# EAGLE board MM-Qwiic-Snap-1x1-Panel (EAGLE 9.6.2), part 1 of 2
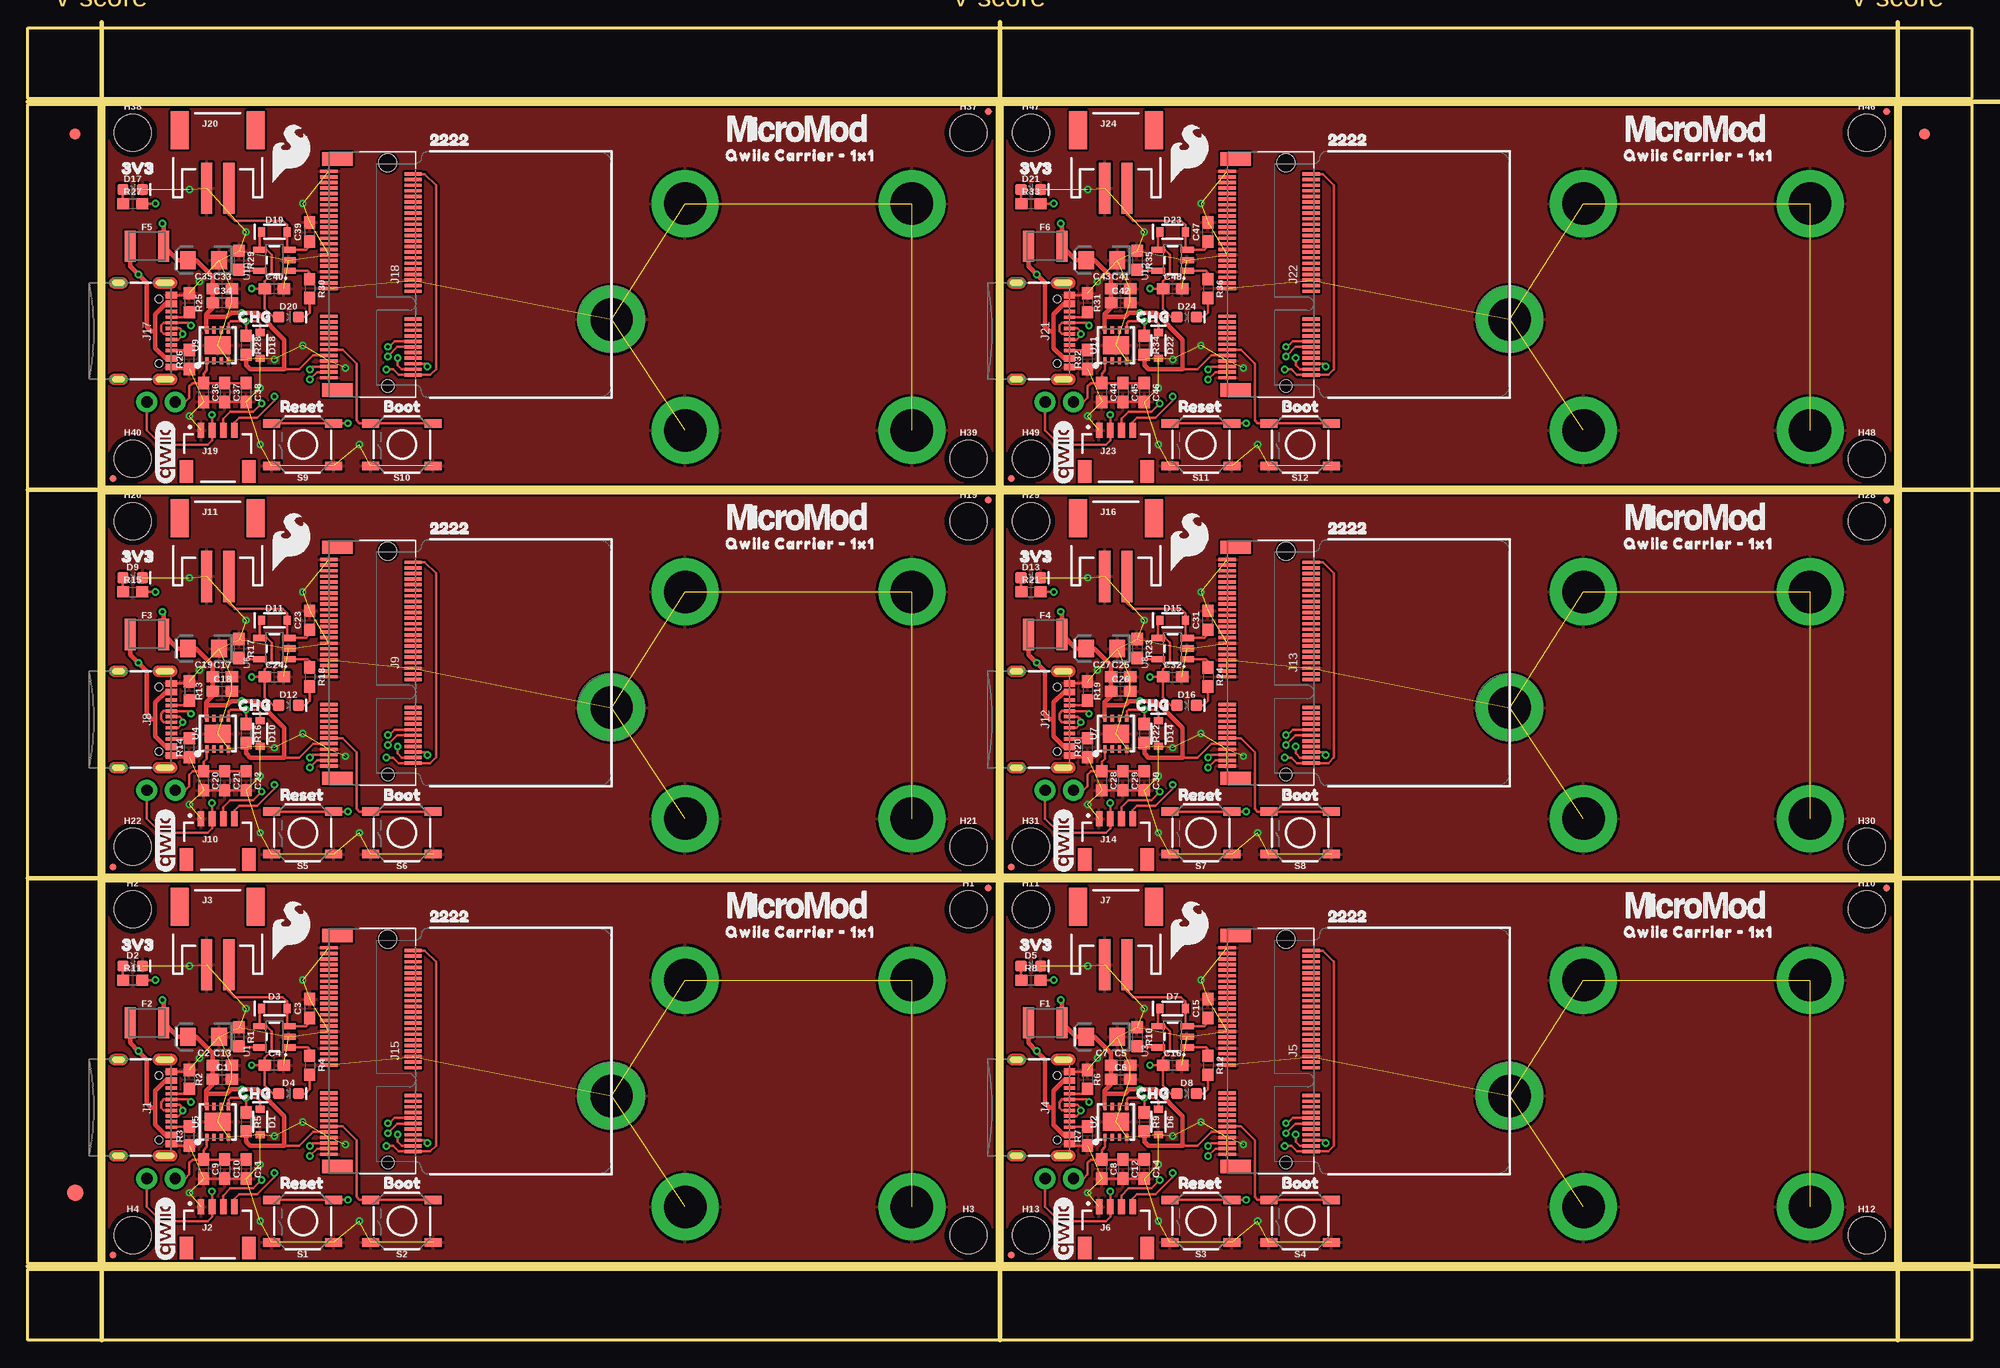
[diagram p0: board, top side]
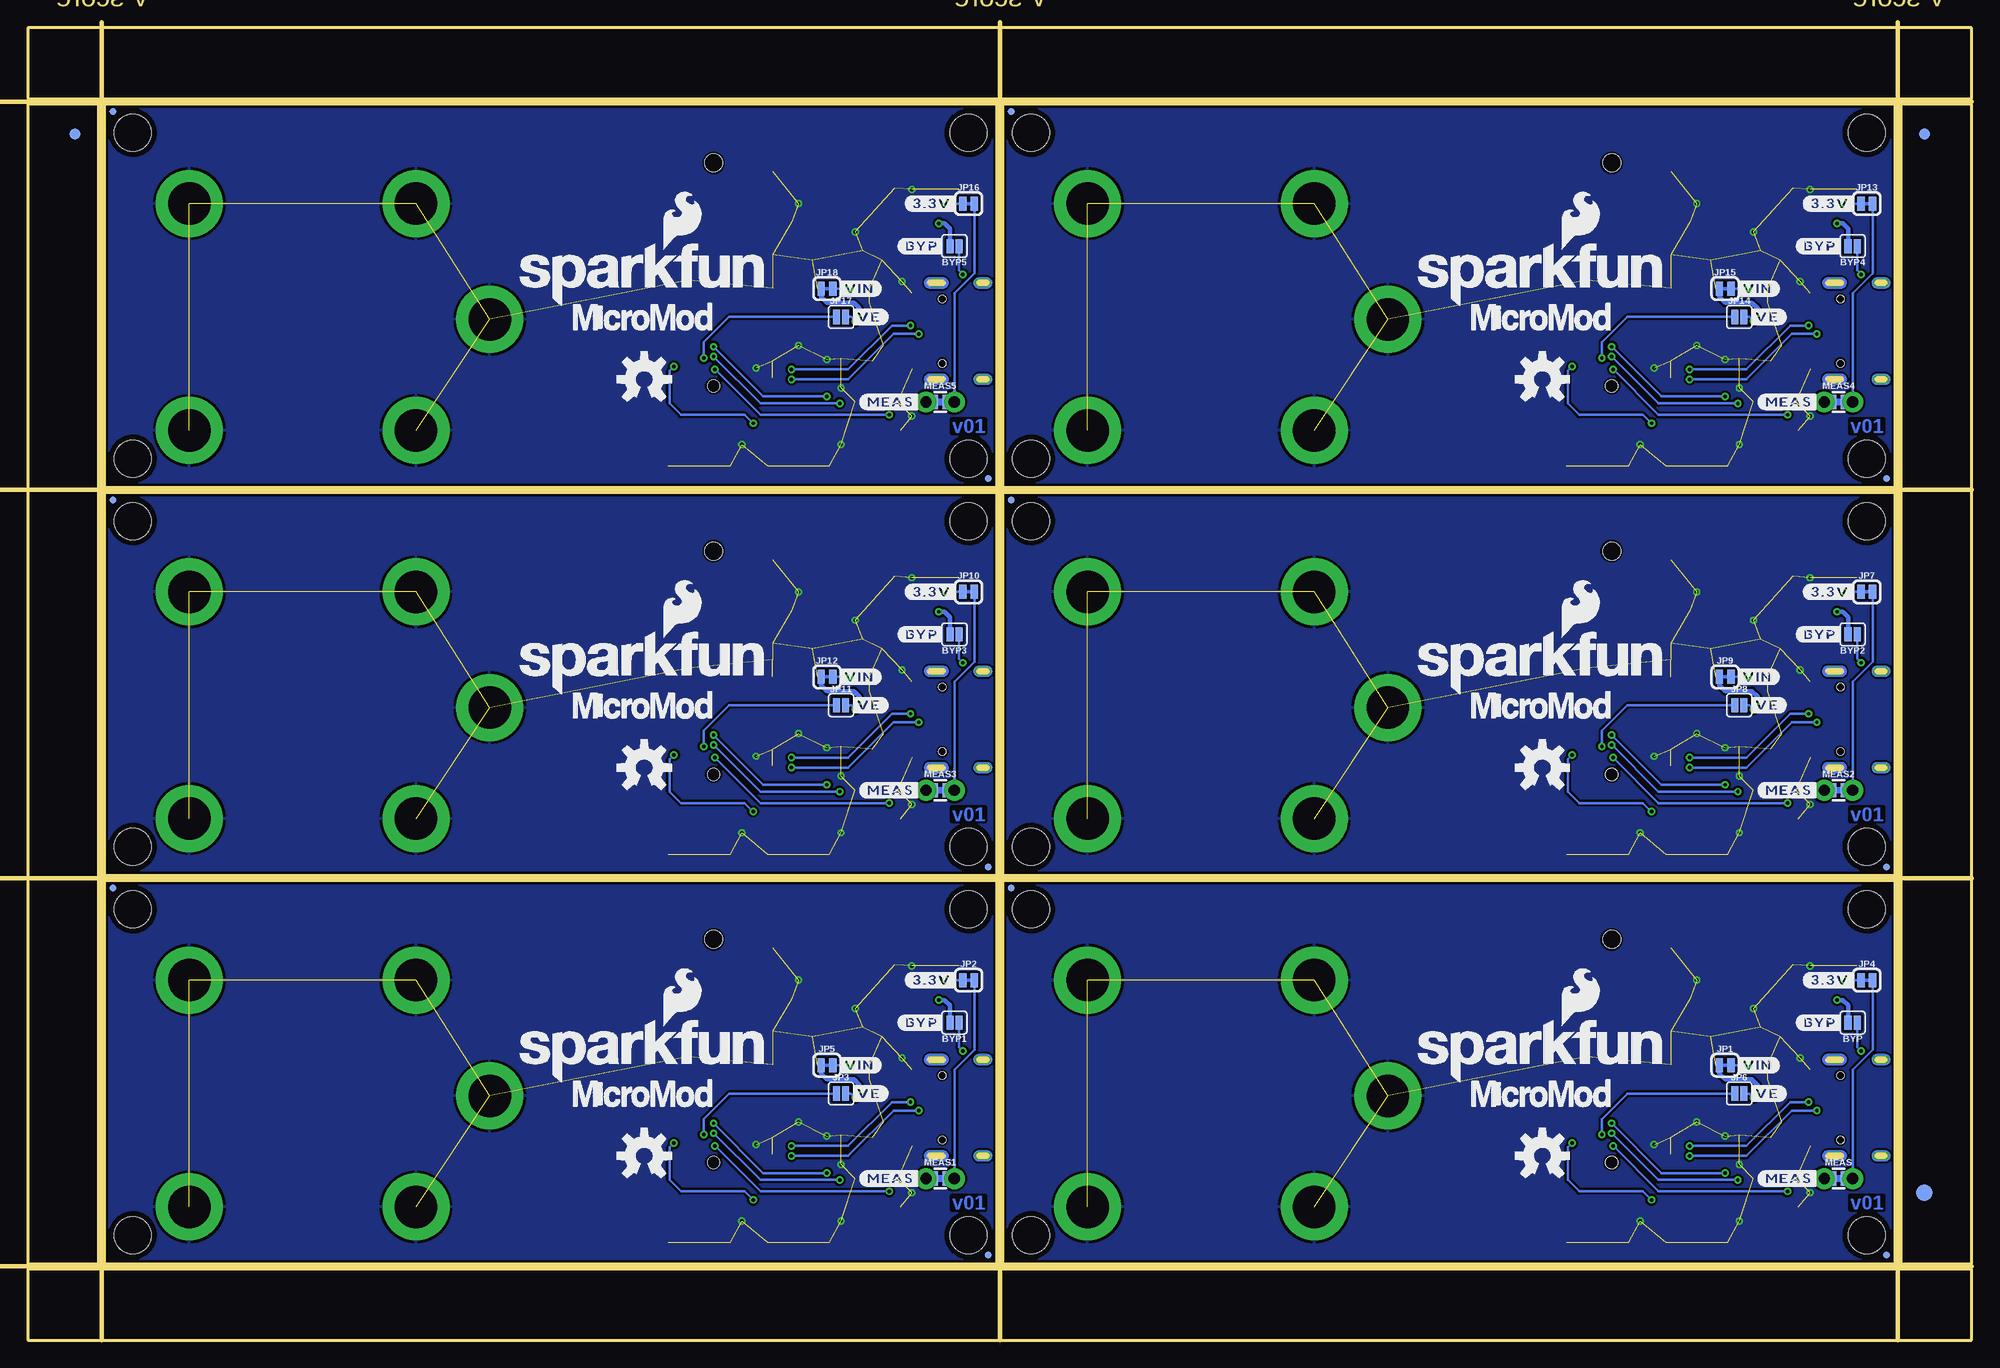
[diagram p1: board, bottom side, seen from below]

Size 174.24 x 117.6 mm. Coordinates in mm from the lower left corner, seen from the top.
Outline: 6.86,6.86 6.86,41.15 86.87,41.15 86.87,6.86 6.86,6.86
Outline: 87.38,6.86 87.38,41.15 167.39,41.15 167.39,6.86 87.38,6.86
Outline: 6.86,41.66 6.86,75.95 86.87,75.95 86.87,41.66 6.86,41.66
Outline: 87.38,41.66 87.38,75.95 167.39,75.95 167.39,41.66 87.38,41.66
Outline: 6.86,76.45 6.86,110.74 86.87,110.74 86.87,76.45 6.86,76.45
Outline: 87.38,76.45 87.38,110.74 167.39,110.74 167.39,76.45 87.38,76.45
Outline: 0,6.35 174.24,6.35 174.24,0 0,0 0,6.35
Outline: 167.89,110.74 174.24,110.74 174.24,6.86 167.89,6.86 167.89,110.74
Outline: 0,117.6 174.24,117.6 174.24,111.25 0,111.25 0,117.6
Outline: 0,110.74 6.35,110.74 6.35,6.86 0,6.86 0,110.74
Copper layers (1*16): Top 0.035mm / dielectric 1.5mm / Bottom 0.035mm
Design rules "MM-Qwiic-Snap-1x1": minimum track width 7mil, minimum drill 12mil, track to track 7mil, track to pad 7mil, pad to pad 7mil, via to via 7mil, smd to smd 7mil, copper to edge 7mil, drill to drill 7mil, minimum pad ring 7mil, minimum via ring 7mil, stop-mask expansion 4mil, vias tented up to drill 25mil, thermal gap 10mil
Net classes: 0 default: width 0 mm, drill 0 mm
Milling: 7 lines

## Footprints (pad centres in the part's own frame; a part is rotated, then mirrored left to right if it is on the bottom)
SMT-JUMPER_2_NO_SILK = smd 0.635 x 1.27: 1 -0.406,0; 2 0.406,0
0603 = smd 1.1 x 1: 1 -0.85,0; 2 0.85,0
EIA3216 = smd 1.4 x 1.6: + 1.4,0; - -1.4,0
SOD-323 = smd 0.63 x 0.83: A 1.15,0; C -1.15,0
LED-0603 = smd 1 x 1: A -0.877,0; C 0.877,0
FIDUCIAL-1X2 = smd 1 x 1: 1 0,0
FIDUCIAL-1.5X3 = smd 1.5 x 1.5: 1 0,0
1210 = smd 1 x 2.8: 1 -1.5,0; 2 1.5,0
FIDUCIAL-MICRO = smd 0.635 x 0.635: 1 0,0
STAND-OFF = hole 3.302: 0,0
STAND-OFF-REFLOW-M2.5 = drill 3.8 pad 6: 1 0,0
USB-C-16P-2LAYER-PADS = smd 0.3 x 1: A5 -1.25,-0.34; A6 -0.25,-0.34; A7 0.25,-0.34; A8 1.25,-0.34; B5 1.75,-0.34; B6 0.75,-0.34; B7 -0.75,-0.34; B8 -1.75,-0.34 | smd 0.6 x 1: GND -3.225,-0.34; GND2 3.225,-0.34; VBUS1 -2.45,-0.34; VBUS2 2.45,-0.34 | drill 0.4 pad 0.6 long: SHLD1 -4.318,-0.915; SHLD2 4.318,-0.915; SHLD3 -4.318,-5.095; SHLD4 4.318,-5.095 | hole 0.65: -2.89,-1.445; 2.89,-1.445
JST04_1MM_RA = smd 0.6 x 1.35: 1 -1.5,0; 2 -0.5,0; 3 0.5,0; 4 1.5,0 | smd 1.2 x 2: NC1 2.8,-3.675; NC2 -2.8,-3.675
JST-2-SMD = smd 1 x 4.6: 1 -1,-3.7; 2 1,-3.7 | smd 1.6 x 3.4: NC1 -3.4,1.5; NC2 3.4,1.5
M.2-CONNECTOR-E = smd 0.3 x 1.55: 1 9.25,-5.275; 2 9,2.275; 3 8.75,-5.275; 4 8.5,2.275; 5 8.25,-5.275; 6 8,2.275; 7 7.75,-5.275; 8 7.5,2.275; 9 7.25,-5.275; 10 7,2.275; 11 6.75,-5.275; 12 6.5,2.275; 13 6.25,-5.275; 14 6,2.275; 15 5.75,-5.275; 16 5.5,2.275; 17 5.25,-5.275; 18 5,2.275; 19 4.75,-5.275; 20 4.5,2.275; 21 4.25,-5.275; 22 4,2.275; 23 3.75,-5.275; 32 1.5,2.275; 33 1.25,-5.275; 34 1,2.275; 35 0.75,-5.275; 36 0.5,2.275; 37 0.25,-5.275; 38 0,2.275; 39 -0.25,-5.275; 40 -0.5,2.275; 41 -0.75,-5.275; 42 -1,2.275; 43 -1.25,-5.275; 44 -1.5,2.275; 45 -1.75,-5.275; 46 -2,2.275; 47 -2.25,-5.275; 48 -2.5,2.275; 49 -2.75,-5.275; 50 -3,2.275; 51 -3.25,-5.275; 52 -3.5,2.275; 53 -3.75,-5.275; 54 -4,2.275; 55 -4.25,-5.275; 56 -4.5,2.275; 57 -4.75,-5.275; 58 -5,2.275; 59 -5.25,-5.275; 60 -5.5,2.275; 61 -5.75,-5.275; 62 -6,2.275; 63 -6.25,-5.275; 64 -6.5,2.275; 65 -6.75,-5.275; 66 -7,2.275; 67 -7.25,-5.275; 68 -7.5,2.275; 69 -7.75,-5.275; 70 -8,2.275; 71 -8.25,-5.275; 72 -8.5,2.275; 73 -8.75,-5.275; 74 -9,2.275; 75 -9.25,-5.275 | smd 1.2 x 2.75: A1 10.35,-4.5; A2 -10.35,-4.5 | hole 1.1: 10,0 | hole 1.6: -10,0
SMT-JUMPER_2_NC_TRACE_SILK = smd 0.66 x 1.27: 1 -0.521,0; 2 0.521,0
COMBO-JUMPER_2_NC_TRACE = smd 0.635 x 1.27: 1 -0.508,0; 2 0.508,0 | drill 1.016 pad 1.88: 3 -1.27,0; 4 1.27,0
TACTILE_SWITCH_SMD_5.2MM = smd 1.524 x 0.762: 1 -2.794,1.905; 2 2.794,1.905; 3 -2.794,-1.905; 4 2.794,-1.905
SOT23-5 = smd 0.55 x 1.2: 1 -0.95,-1.3; 2 0,-1.3; 3 0.95,-1.3; 4 0.95,1.3; 5 -0.95,1.3
UDFN-8 = smd 0.3 x 0.65: 1 -0.975,-1.375; 2 -0.325,-1.375; 3 0.325,-1.375; 4 0.975,-1.375; 5 0.975,1.375; 6 0.325,1.375; 7 -0.325,1.375; 8 -0.975,1.375 | smd 2.35 x 1.6: EP 0,0

## Placement (x,y rotation side)
BYP  JUMPER-SMT_2_NO_SILK  [SMT-JUMPER_2_NO_SILK]  10.67,28.45 180 bottom
BYP1  JUMPER-SMT_2_NO_SILK  [SMT-JUMPER_2_NO_SILK]  91.19,28.45 180 bottom
BYP2  JUMPER-SMT_2_NO_SILK  [SMT-JUMPER_2_NO_SILK]  10.67,63.25 180 bottom
BYP3  JUMPER-SMT_2_NO_SILK  [SMT-JUMPER_2_NO_SILK]  91.19,63.25 180 bottom
BYP4  JUMPER-SMT_2_NO_SILK  [SMT-JUMPER_2_NO_SILK]  10.67,98.04 180 bottom
BYP5  JUMPER-SMT_2_NO_SILK  [SMT-JUMPER_2_NO_SILK]  91.19,98.04 180 bottom
C1  0.1uF  [0603]  17.44,23.37 0 top
C2  10uF  [EIA3216]  15.75,27.18 180 top
C3  4.7uF  [0603]  25.27,29.72 90 top
C4  4.7uF  [0603]  22.1,24.64 0 top
C5  0.22uF  [0603]  97.96,24.64 0 top
C6  0.1uF  [0603]  97.96,23.37 0 top
C7  10uF  [EIA3216]  96.27,27.18 180 top
C8  10uF  [0603]  96.27,15.33 270 top
C9  10uF  [0603]  15.75,15.33 270 top
C10  1.0uF  [0603]  17.65,15.33 270 top
C11  0.22uF  [0603]  19.56,15.33 270 top
C12  1.0uF  [0603]  98.17,15.33 270 top
C13  0.22uF  [0603]  17.44,24.64 0 top
C14  0.22uF  [0603]  100.08,15.33 270 top
C15  4.7uF  [0603]  105.79,29.72 90 top
C16  4.7uF  [0603]  102.62,24.64 0 top
C17  0.22uF  [0603]  17.44,59.44 0 top
C18  0.1uF  [0603]  17.44,58.17 0 top
C19  10uF  [EIA3216]  15.75,61.98 180 top
C20  10uF  [0603]  15.75,50.13 270 top
C21  1.0uF  [0603]  17.65,50.13 270 top
C22  0.22uF  [0603]  19.56,50.13 270 top
C23  4.7uF  [0603]  25.27,64.52 90 top
C24  4.7uF  [0603]  22.1,59.44 0 top
C25  0.22uF  [0603]  97.96,59.44 0 top
C26  0.1uF  [0603]  97.96,58.17 0 top
C27  10uF  [EIA3216]  96.27,61.98 180 top
C28  10uF  [0603]  96.27,50.13 270 top
C29  1.0uF  [0603]  98.17,50.13 270 top
C30  0.22uF  [0603]  100.08,50.13 270 top
C31  4.7uF  [0603]  105.79,64.52 90 top
C32  4.7uF  [0603]  102.62,59.44 0 top
C33  0.22uF  [0603]  17.44,94.23 0 top
C34  0.1uF  [0603]  17.44,92.96 0 top
C35  10uF  [EIA3216]  15.75,96.77 180 top
C36  10uF  [0603]  15.75,84.92 270 top
C37  1.0uF  [0603]  17.65,84.92 270 top
C38  0.22uF  [0603]  19.56,84.92 270 top
C39  4.7uF  [0603]  25.27,99.31 90 top
C40  4.7uF  [0603]  22.1,94.23 0 top
C41  0.22uF  [0603]  97.96,94.23 0 top
C42  0.1uF  [0603]  97.96,92.96 0 top
C43  10uF  [EIA3216]  96.27,96.77 180 top
C44  10uF  [0603]  96.27,84.92 270 top
C45  1.0uF  [0603]  98.17,84.92 270 top
C46  0.22uF  [0603]  100.08,84.92 270 top
C47  4.7uF  [0603]  105.79,99.31 90 top
C48  4.7uF  [0603]  102.62,94.23 0 top
D1  3.3V  [SOD-323]  20.83,19.56 270 top
D2  RED  [LED-0603]  9.4,33.53 0 top
D3  3A/10V/280mV  [SOD-323]  22.1,29.72 0 top
D4  Yellow  [LED-0603]  23.37,22.1 0 top
D5  RED  [LED-0603]  89.92,33.53 0 top
D6  3.3V  [SOD-323]  101.35,19.56 270 top
D7  3A/10V/280mV  [SOD-323]  102.62,29.72 0 top
D8  Yellow  [LED-0603]  103.89,22.1 0 top
D9  RED  [LED-0603]  9.4,68.33 0 top
D10  3.3V  [SOD-323]  20.83,54.36 270 top
D11  3A/10V/280mV  [SOD-323]  22.1,64.52 0 top
D12  Yellow  [LED-0603]  23.37,56.9 0 top
D13  RED  [LED-0603]  89.92,68.33 0 top
D14  3.3V  [SOD-323]  101.35,54.36 270 top
D15  3A/10V/280mV  [SOD-323]  102.62,64.52 0 top
D16  Yellow  [LED-0603]  103.89,56.9 0 top
D17  RED  [LED-0603]  9.4,103.12 0 top
D18  3.3V  [SOD-323]  20.83,89.15 270 top
D19  3A/10V/280mV  [SOD-323]  22.1,99.31 0 top
D20  Yellow  [LED-0603]  23.37,91.69 0 top
D21  RED  [LED-0603]  89.92,103.12 0 top
D22  3.3V  [SOD-323]  101.35,89.15 270 top
D23  3A/10V/280mV  [SOD-323]  102.62,99.31 0 top
D24  Yellow  [LED-0603]  103.89,91.69 0 top
E$1  [FIDUCIAL-1X2]  4.23,108.08 0 top
E$2  [FIDUCIAL-1X2]  4.23,108.08 0 bottom
E$3  [FIDUCIAL-1X2]  170.01,108.08 0 top
E$4  [FIDUCIAL-1X2]  170.01,108.08 0 bottom
E$5  [FIDUCIAL-1.5X3]  4.23,13.21 0 top
E$6  [FIDUCIAL-1.5X3]  4.23,13.21 0 bottom
F1  6V/2A  [1210]  91.19,28.45 0 top
F2  6V/2A  [1210]  10.67,28.45 0 top
F3  6V/2A  [1210]  10.67,63.25 0 top
F4  6V/2A  [1210]  91.19,63.25 0 top
F5  6V/2A  [1210]  10.67,98.04 0 top
F6  6V/2A  [1210]  91.19,98.04 0 top
FD1  FIDUCIALUFIDUCIAL  [FIDUCIAL-MICRO]  7.62,7.62 0 top
FD2  FIDUCIALUFIDUCIAL  [FIDUCIAL-MICRO]  86.11,40.51 0 top
FD3  FIDUCIALUFIDUCIAL  [FIDUCIAL-MICRO]  7.62,7.62 0 bottom
FD4  FIDUCIALUFIDUCIAL  [FIDUCIAL-MICRO]  86.11,40.51 0 bottom
FD5  FIDUCIALUFIDUCIAL  [FIDUCIAL-MICRO]  88.14,7.62 0 top
FD6  FIDUCIALUFIDUCIAL  [FIDUCIAL-MICRO]  166.62,40.51 0 top
FD7  FIDUCIALUFIDUCIAL  [FIDUCIAL-MICRO]  88.14,7.62 0 bottom
FD8  FIDUCIALUFIDUCIAL  [FIDUCIAL-MICRO]  166.62,40.51 0 bottom
FD9  FIDUCIALUFIDUCIAL  [FIDUCIAL-MICRO]  7.62,42.42 0 top
FD10  FIDUCIALUFIDUCIAL  [FIDUCIAL-MICRO]  86.11,75.31 0 top
FD11  FIDUCIALUFIDUCIAL  [FIDUCIAL-MICRO]  7.62,42.42 0 bottom
FD12  FIDUCIALUFIDUCIAL  [FIDUCIAL-MICRO]  86.11,75.31 0 bottom
FD13  FIDUCIALUFIDUCIAL  [FIDUCIAL-MICRO]  88.14,42.42 0 top
FD14  FIDUCIALUFIDUCIAL  [FIDUCIAL-MICRO]  166.62,75.31 0 top
FD15  FIDUCIALUFIDUCIAL  [FIDUCIAL-MICRO]  88.14,42.42 0 bottom
FD16  FIDUCIALUFIDUCIAL  [FIDUCIAL-MICRO]  166.62,75.31 0 bottom
FD17  FIDUCIALUFIDUCIAL  [FIDUCIAL-MICRO]  7.62,77.22 0 top
FD18  FIDUCIALUFIDUCIAL  [FIDUCIAL-MICRO]  86.11,110.11 0 top
FD19  FIDUCIALUFIDUCIAL  [FIDUCIAL-MICRO]  7.62,77.22 0 bottom
FD20  FIDUCIALUFIDUCIAL  [FIDUCIAL-MICRO]  86.11,110.11 0 bottom
FD21  FIDUCIALUFIDUCIAL  [FIDUCIAL-MICRO]  88.14,77.22 0 top
FD22  FIDUCIALUFIDUCIAL  [FIDUCIAL-MICRO]  166.62,110.11 0 top
FD23  FIDUCIALUFIDUCIAL  [FIDUCIAL-MICRO]  88.14,77.22 0 bottom
FD24  FIDUCIALUFIDUCIAL  [FIDUCIAL-MICRO]  166.62,110.11 0 bottom
H1  STAND-OFF  [STAND-OFF]  84.33,38.61 0 top
H2  STAND-OFF  [STAND-OFF]  9.4,38.61 0 top
H3  STAND-OFF  [STAND-OFF]  84.33,9.4 0 top
H4  STAND-OFF  [STAND-OFF]  9.4,9.4 0 top
H5  STAND-OFF-REFLOW2.5MM_TALL  [STAND-OFF-REFLOW-M2.5]  52.33,21.89 0 top
H6  STAND-OFF-REFLOW2.5MM_TALL  [STAND-OFF-REFLOW-M2.5]  58.93,32.26 0 top
H7  STAND-OFF-REFLOW2.5MM_TALL  [STAND-OFF-REFLOW-M2.5]  58.93,11.94 0 top
H8  STAND-OFF-REFLOW2.5MM_TALL  [STAND-OFF-REFLOW-M2.5]  79.25,11.94 0 top
H9  STAND-OFF-REFLOW2.5MM_TALL  [STAND-OFF-REFLOW-M2.5]  79.25,32.26 0 top
H10  STAND-OFF  [STAND-OFF]  164.85,38.61 0 top
H11  STAND-OFF  [STAND-OFF]  89.92,38.61 0 top
H12  STAND-OFF  [STAND-OFF]  164.85,9.4 0 top
H13  STAND-OFF  [STAND-OFF]  89.92,9.4 0 top
H14  STAND-OFF-REFLOW2.5MM_TALL  [STAND-OFF-REFLOW-M2.5]  132.85,21.89 0 top
H15  STAND-OFF-REFLOW2.5MM_TALL  [STAND-OFF-REFLOW-M2.5]  139.45,32.26 0 top
H16  STAND-OFF-REFLOW2.5MM_TALL  [STAND-OFF-REFLOW-M2.5]  139.45,11.94 0 top
H17  STAND-OFF-REFLOW2.5MM_TALL  [STAND-OFF-REFLOW-M2.5]  159.77,11.94 0 top
H18  STAND-OFF-REFLOW2.5MM_TALL  [STAND-OFF-REFLOW-M2.5]  159.77,32.26 0 top
H19  STAND-OFF  [STAND-OFF]  84.33,73.41 0 top
H20  STAND-OFF  [STAND-OFF]  9.4,73.41 0 top
H21  STAND-OFF  [STAND-OFF]  84.33,44.2 0 top
H22  STAND-OFF  [STAND-OFF]  9.4,44.2 0 top
H23  STAND-OFF-REFLOW2.5MM_TALL  [STAND-OFF-REFLOW-M2.5]  52.33,56.69 0 top
H24  STAND-OFF-REFLOW2.5MM_TALL  [STAND-OFF-REFLOW-M2.5]  58.93,67.06 0 top
H25  STAND-OFF-REFLOW2.5MM_TALL  [STAND-OFF-REFLOW-M2.5]  58.93,46.74 0 top
H26  STAND-OFF-REFLOW2.5MM_TALL  [STAND-OFF-REFLOW-M2.5]  79.25,46.74 0 top
H27  STAND-OFF-REFLOW2.5MM_TALL  [STAND-OFF-REFLOW-M2.5]  79.25,67.06 0 top
H28  STAND-OFF  [STAND-OFF]  164.85,73.41 0 top
H29  STAND-OFF  [STAND-OFF]  89.92,73.41 0 top
H30  STAND-OFF  [STAND-OFF]  164.85,44.2 0 top
H31  STAND-OFF  [STAND-OFF]  89.92,44.2 0 top
H32  STAND-OFF-REFLOW2.5MM_TALL  [STAND-OFF-REFLOW-M2.5]  132.85,56.69 0 top
H33  STAND-OFF-REFLOW2.5MM_TALL  [STAND-OFF-REFLOW-M2.5]  139.45,67.06 0 top
H34  STAND-OFF-REFLOW2.5MM_TALL  [STAND-OFF-REFLOW-M2.5]  139.45,46.74 0 top
H35  STAND-OFF-REFLOW2.5MM_TALL  [STAND-OFF-REFLOW-M2.5]  159.77,46.74 0 top
H36  STAND-OFF-REFLOW2.5MM_TALL  [STAND-OFF-REFLOW-M2.5]  159.77,67.06 0 top
H37  STAND-OFF  [STAND-OFF]  84.33,108.2 0 top
H38  STAND-OFF  [STAND-OFF]  9.4,108.2 0 top
H39  STAND-OFF  [STAND-OFF]  84.33,78.99 0 top
H40  STAND-OFF  [STAND-OFF]  9.4,78.99 0 top
H41  STAND-OFF-REFLOW2.5MM_TALL  [STAND-OFF-REFLOW-M2.5]  52.33,91.48 0 top
H42  STAND-OFF-REFLOW2.5MM_TALL  [STAND-OFF-REFLOW-M2.5]  58.93,101.85 0 top
H43  STAND-OFF-REFLOW2.5MM_TALL  [STAND-OFF-REFLOW-M2.5]  58.93,81.53 0 top
H44  STAND-OFF-REFLOW2.5MM_TALL  [STAND-OFF-REFLOW-M2.5]  79.25,81.53 0 top
H45  STAND-OFF-REFLOW2.5MM_TALL  [STAND-OFF-REFLOW-M2.5]  79.25,101.85 0 top
H46  STAND-OFF  [STAND-OFF]  164.85,108.2 0 top
H47  STAND-OFF  [STAND-OFF]  89.92,108.2 0 top
H48  STAND-OFF  [STAND-OFF]  164.85,78.99 0 top
H49  STAND-OFF  [STAND-OFF]  89.92,78.99 0 top
H50  STAND-OFF-REFLOW2.5MM_TALL  [STAND-OFF-REFLOW-M2.5]  132.85,91.48 0 top
H51  STAND-OFF-REFLOW2.5MM_TALL  [STAND-OFF-REFLOW-M2.5]  139.45,101.85 0 top
H52  STAND-OFF-REFLOW2.5MM_TALL  [STAND-OFF-REFLOW-M2.5]  139.45,81.53 0 top
H53  STAND-OFF-REFLOW2.5MM_TALL  [STAND-OFF-REFLOW-M2.5]  159.77,81.53 0 top
H54  STAND-OFF-REFLOW2.5MM_TALL  [STAND-OFF-REFLOW-M2.5]  159.77,101.85 0 top
J1  [USB-C-16P-2LAYER-PADS]  13.21,20.83 270 top
J2  QWIIC_RIGHT_ANGLE  [JST04_1MM_RA]  17.02,11.94 0 top
J3  [JST-2-SMD]  17.02,37.34 0 top
J4  [USB-C-16P-2LAYER-PADS]  93.73,20.83 270 top
J5  MICROMOD-2222-C  [M.2-CONNECTOR-E]  112.78,25.91 270 top
J6  QWIIC_RIGHT_ANGLE  [JST04_1MM_RA]  97.54,11.94 0 top
J7  [JST-2-SMD]  97.54,37.34 0 top
J8  [USB-C-16P-2LAYER-PADS]  13.21,55.63 270 top
J9  MICROMOD-2222-C  [M.2-CONNECTOR-E]  32.26,60.71 270 top
J10  QWIIC_RIGHT_ANGLE  [JST04_1MM_RA]  17.02,46.74 0 top
J11  [JST-2-SMD]  17.02,72.14 0 top
J12  [USB-C-16P-2LAYER-PADS]  93.73,55.63 270 top
J13  MICROMOD-2222-C  [M.2-CONNECTOR-E]  112.78,60.71 270 top
J14  QWIIC_RIGHT_ANGLE  [JST04_1MM_RA]  97.54,46.74 0 top
J15  MICROMOD-2222-C  [M.2-CONNECTOR-E]  32.26,25.91 270 top
J16  [JST-2-SMD]  97.54,72.14 0 top
J17  [USB-C-16P-2LAYER-PADS]  13.21,90.42 270 top
J18  MICROMOD-2222-C  [M.2-CONNECTOR-E]  32.26,95.5 270 top
J19  QWIIC_RIGHT_ANGLE  [JST04_1MM_RA]  17.02,81.53 0 top
J20  [JST-2-SMD]  17.02,106.93 0 top
J21  [USB-C-16P-2LAYER-PADS]  93.73,90.42 270 top
J22  MICROMOD-2222-C  [M.2-CONNECTOR-E]  112.78,95.5 270 top
J23  QWIIC_RIGHT_ANGLE  [JST04_1MM_RA]  97.54,81.53 0 top
J24  [JST-2-SMD]  97.54,106.93 0 top
JP1  JUMPER-SMT_2_NC_TRACE_SILK  [SMT-JUMPER_2_NC_TRACE_SILK]  22.1,24.64 0 bottom
JP2  3V3 LED  [SMT-JUMPER_2_NC_TRACE_SILK]  89.92,32.26 0 bottom
JP3  VE  [SMT-JUMPER_2_NO_SILK]  101.35,22.1 0 bottom
JP4  3V3 LED  [SMT-JUMPER_2_NC_TRACE_SILK]  9.4,32.26 0 bottom
JP5  JUMPER-SMT_2_NC_TRACE_SILK  [SMT-JUMPER_2_NC_TRACE_SILK]  102.62,24.64 0 bottom
JP6  VE  [SMT-JUMPER_2_NO_SILK]  20.83,22.1 0 bottom
JP7  3V3 LED  [SMT-JUMPER_2_NC_TRACE_SILK]  9.4,67.06 0 bottom
JP8  VE  [SMT-JUMPER_2_NO_SILK]  20.83,56.9 0 bottom
JP9  JUMPER-SMT_2_NC_TRACE_SILK  [SMT-JUMPER_2_NC_TRACE_SILK]  22.1,59.44 0 bottom
JP10  3V3 LED  [SMT-JUMPER_2_NC_TRACE_SILK]  89.92,67.06 0 bottom
JP11  VE  [SMT-JUMPER_2_NO_SILK]  101.35,56.9 0 bottom
JP12  JUMPER-SMT_2_NC_TRACE_SILK  [SMT-JUMPER_2_NC_TRACE_SILK]  102.62,59.44 0 bottom
JP13  3V3 LED  [SMT-JUMPER_2_NC_TRACE_SILK]  9.4,101.85 0 bottom
JP14  VE  [SMT-JUMPER_2_NO_SILK]  20.83,91.69 0 bottom
JP15  JUMPER-SMT_2_NC_TRACE_SILK  [SMT-JUMPER_2_NC_TRACE_SILK]  22.1,94.23 0 bottom
JP16  3V3 LED  [SMT-JUMPER_2_NC_TRACE_SILK]  89.92,101.85 0 bottom
JP17  VE  [SMT-JUMPER_2_NO_SILK]  101.35,91.69 0 bottom
JP18  JUMPER-SMT_2_NC_TRACE_SILK  [SMT-JUMPER_2_NC_TRACE_SILK]  102.62,94.23 0 bottom
LOGO1  SFE_LOGO_NAME_FLAME.2_INCH  [SFE_LOGO_NAME_FLAME_.2]  38.61,25.91 0 bottom
LOGO2  QWIIC_LOGO_CONNECTOR  [QWIIC_5.5MM]  12.32,9.97 90 top
LOGO3  OSHW-LOGOM  [OSHW-LOGO-M]  38.48,16.51 0 bottom
LOGO4  QWIIC_LOGO_CONNECTOR  [QWIIC_5.5MM]  92.84,9.97 90 top
LOGO5  OSHW-LOGOM  [OSHW-LOGO-M]  119,16.51 0 bottom
LOGO6  SFE_LOGO_NAME_FLAME.2_INCH  [SFE_LOGO_NAME_FLAME_.2]  119.13,25.91 0 bottom
LOGO7  QWIIC_LOGO_CONNECTOR  [QWIIC_5.5MM]  12.32,44.77 90 top
LOGO8  OSHW-LOGOM  [OSHW-LOGO-M]  38.48,51.31 0 bottom
LOGO9  SFE_LOGO_NAME_FLAME.2_INCH  [SFE_LOGO_NAME_FLAME_.2]  38.61,60.71 0 bottom
LOGO10  QWIIC_LOGO_CONNECTOR  [QWIIC_5.5MM]  92.84,44.77 90 top
LOGO11  OSHW-LOGOM  [OSHW-LOGO-M]  119,51.31 0 bottom
LOGO12  SFE_LOGO_NAME_FLAME.2_INCH  [SFE_LOGO_NAME_FLAME_.2]  119.13,60.71 0 bottom
LOGO13  QWIIC_LOGO_CONNECTOR  [QWIIC_5.5MM]  12.32,79.57 90 top
LOGO14  OSHW-LOGOM  [OSHW-LOGO-M]  38.48,86.11 0 bottom
LOGO15  SFE_LOGO_NAME_FLAME.2_INCH  [SFE_LOGO_NAME_FLAME_.2]  38.61,95.5 0 bottom
LOGO16  QWIIC_LOGO_CONNECTOR  [QWIIC_5.5MM]  92.84,79.57 90 top
LOGO17  OSHW-LOGOM  [OSHW-LOGO-M]  119,86.11 0 bottom
LOGO18  SFE_LOGO_NAME_FLAME.2_INCH  [SFE_LOGO_NAME_FLAME_.2]  119.13,95.5 0 bottom
MEAS  [COMBO-JUMPER_2_NC_TRACE]  11.94,14.48 0 bottom
MEAS1  [COMBO-JUMPER_2_NC_TRACE]  92.46,14.48 0 bottom
MEAS2  [COMBO-JUMPER_2_NC_TRACE]  11.94,49.28 0 bottom
MEAS3  [COMBO-JUMPER_2_NC_TRACE]  92.46,49.28 0 bottom
MEAS4  [COMBO-JUMPER_2_NC_TRACE]  11.94,84.07 0 bottom
MEAS5  [COMBO-JUMPER_2_NC_TRACE]  92.46,84.07 0 bottom
R1  2.2k  [0603]  18.92,27.18 270 top
R2  5.1k  [0603]  14.48,23.37 270 top
R3  5.1k  [0603]  14.48,18.29 90 top
R4  1k  [0603]  25.27,24.64 270 top
R5  100k  [0603]  19.56,19.56 270 top
R6  5.1k  [0603]  95,23.37 270 top
R7  5.1k  [0603]  95,18.29 90 top
R8  1k  [0603]  89.92,32.26 0 top
R9  100k  [0603]  100.08,19.56 270 top
R10  2.2k  [0603]  99.44,27.18 270 top
R11  1k  [0603]  9.4,32.26 0 top
R12  1k  [0603]  105.79,24.64 270 top
R13  5.1k  [0603]  14.48,58.17 270 top
R14  5.1k  [0603]  14.48,53.09 90 top
R15  1k  [0603]  9.4,67.06 0 top
R16  100k  [0603]  19.56,54.36 270 top
R17  2.2k  [0603]  18.92,61.98 270 top
R18  1k  [0603]  25.27,59.44 270 top
R19  5.1k  [0603]  95,58.17 270 top
R20  5.1k  [0603]  95,53.09 90 top
R21  1k  [0603]  89.92,67.06 0 top
R22  100k  [0603]  100.08,54.36 270 top
R23  2.2k  [0603]  99.44,61.98 270 top
R24  1k  [0603]  105.79,59.44 270 top
R25  5.1k  [0603]  14.48,92.96 270 top
R26  5.1k  [0603]  14.48,87.88 90 top
R27  1k  [0603]  9.4,101.85 0 top
R28  100k  [0603]  19.56,89.15 270 top
R29  2.2k  [0603]  18.92,96.77 270 top
R30  1k  [0603]  25.27,94.23 270 top
R31  5.1k  [0603]  95,92.96 270 top
R32  5.1k  [0603]  95,87.88 90 top
R33  1k  [0603]  89.92,101.85 0 top
R34  100k  [0603]  100.08,89.15 270 top
R35  2.2k  [0603]  99.44,96.77 270 top
R36  1k  [0603]  105.79,94.23 270 top
S1  Reset  [TACTILE_SWITCH_SMD_5.2MM]  24.64,10.67 180 top
S2  BOOT  [TACTILE_SWITCH_SMD_5.2MM]  33.53,10.67 180 top
S3  Reset  [TACTILE_SWITCH_SMD_5.2MM]  105.16,10.67 180 top
S4  BOOT  [TACTILE_SWITCH_SMD_5.2MM]  114.05,10.67 180 top
S5  Reset  [TACTILE_SWITCH_SMD_5.2MM]  24.64,45.47 180 top
S6  BOOT  [TACTILE_SWITCH_SMD_5.2MM]  33.53,45.47 180 top
S7  Reset  [TACTILE_SWITCH_SMD_5.2MM]  105.16,45.47 180 top
S8  BOOT  [TACTILE_SWITCH_SMD_5.2MM]  114.05,45.47 180 top
S9  Reset  [TACTILE_SWITCH_SMD_5.2MM]  24.64,80.26 180 top
S10  BOOT  [TACTILE_SWITCH_SMD_5.2MM]  33.53,80.26 180 top
S11  Reset  [TACTILE_SWITCH_SMD_5.2MM]  105.16,80.26 180 top
S12  BOOT  [TACTILE_SWITCH_SMD_5.2MM]  114.05,80.26 180 top
U1  MCP73831  [SOT23-5]  22.1,27.18 90 top
U2  AP7361C-33FGEUDFN-8  [UDFN-8]  97.54,19.56 0 top
U3  MCP73831  [SOT23-5]  102.62,27.18 90 top
U4  AP7361C-33FGEUDFN-8  [UDFN-8]  17.02,54.36 0 top
U5  AP7361C-33FGEUDFN-8  [UDFN-8]  17.02,19.56 0 top
U6  MCP73831  [SOT23-5]  22.1,61.98 90 top
U7  AP7361C-33FGEUDFN-8  [UDFN-8]  97.54,54.36 0 top
U8  MCP73831  [SOT23-5]  102.62,61.98 90 top
U9  AP7361C-33FGEUDFN-8  [UDFN-8]  17.02,89.15 0 top
U10  MCP73831  [SOT23-5]  22.1,96.77 90 top
U11  AP7361C-33FGEUDFN-8  [UDFN-8]  97.54,89.15 0 top
U12  MCP73831  [SOT23-5]  102.62,96.77 90 top
U$1  [3V31]  7.49,35.43 0 top
U$2  [RESET3]  21.72,14.1 0 top
U$3  [QWIIC_CARRIER_#_1X1_0]  61.85,36.58 0 top
U$4  [CHG0]  18.16,22.1 0 top
U$5  [#VIN#0]  21.21,24.64 0 bottom
U$6  [#3#3V#0]  15.11,32.26 0 bottom
U$7  [#BYP#0]  15.75,28.45 0 bottom
U$8  [#VE#0]  20.07,22.1 0 bottom
U$9  [#MEAS#0]  19.18,14.48 0 bottom
U$10  [RESET3]  102.23,14.1 0 top
U$11  [BOOT2]  111.51,14.1 0 top
U$12  [22229]  115.61,37.98 0 top
U$13  [3V31]  88.01,35.43 0 top
U$14  [SFE_LOGO_FLAME_.2]  104.14,36.7 0 top
U$15  [MICROMOD_LOGO_.5]  149.48,38.99 0 top
U$16  [MICROMOD_LOGO_.5]  119.13,22.1 0 bottom
U$17  [QWIIC_CARRIER_#_1X1_0]  142.37,36.58 0 top
U$18  [CHG0]  98.68,22.1 0 top
U$19  [BOOT2]  30.99,14.1 0 top
U$20  [#3#3V#0]  95.63,32.26 0 bottom
U$21  [#BYP#0]  96.27,28.45 0 bottom
U$22  [#MEAS#0]  99.7,14.48 0 bottom
U$23  [#VIN#0]  101.73,24.64 0 bottom
U$24  [#VE#0]  100.58,22.1 0 bottom
U$25  [RESET3]  21.72,48.89 0 top
U$26  [BOOT2]  30.99,48.89 0 top
U$27  [22229]  35.09,72.78 0 top
U$28  [3V31]  7.49,70.23 0 top
U$29  [SFE_LOGO_FLAME_.2]  23.62,71.5 0 top
U$30  [MICROMOD_LOGO_.5]  68.96,73.79 0 top
U$31  [MICROMOD_LOGO_.5]  38.61,56.9 0 bottom
U$32  [QWIIC_CARRIER_#_1X1_0]  61.85,71.37 0 top
U$33  [CHG0]  18.16,56.9 0 top
U$34  [#3#3V#0]  15.11,67.06 0 bottom
U$35  [#BYP#0]  15.75,63.25 0 bottom
U$36  [#MEAS#0]  19.18,49.28 0 bottom
U$37  [#VIN#0]  21.21,59.44 0 bottom
U$38  [#VE#0]  20.07,56.9 0 bottom
U$39  [RESET3]  102.23,48.89 0 top
U$40  [BOOT2]  111.51,48.89 0 top
U$41  [22229]  115.61,72.78 0 top
U$42  [3V31]  88.01,70.23 0 top
U$43  [SFE_LOGO_FLAME_.2]  104.14,71.5 0 top
U$44  [SFE_LOGO_FLAME_.2]  23.62,36.7 0 top
U$45  [MICROMOD_LOGO_.5]  149.48,73.79 0 top
U$46  [MICROMOD_LOGO_.5]  119.13,56.9 0 bottom
U$47  [QWIIC_CARRIER_#_1X1_0]  142.37,71.37 0 top
U$48  [CHG0]  98.68,56.9 0 top
U$49  [#3#3V#0]  95.63,67.06 0 bottom
U$50  [#BYP#0]  96.27,63.25 0 bottom
U$51  [#MEAS#0]  99.7,49.28 0 bottom
U$52  [#VIN#0]  101.73,59.44 0 bottom
U$53  [#VE#0]  100.58,56.9 0 bottom
U$54  [RESET3]  21.72,83.69 0 top
U$55  [22229]  35.09,37.98 0 top
U$56  [BOOT2]  30.99,83.69 0 top
U$57  [22229]  35.09,107.57 0 top
U$58  [3V31]  7.49,105.03 0 top
U$59  [SFE_LOGO_FLAME_.2]  23.62,106.3 0 top
U$60  [MICROMOD_LOGO_.5]  68.96,108.59 0 top
U$61  [MICROMOD_LOGO_.5]  38.61,91.69 0 bottom
U$62  [QWIIC_CARRIER_#_1X1_0]  61.85,106.17 0 top
U$63  [CHG0]  18.16,91.69 0 top
U$64  [#3#3V#0]  15.11,101.85 0 bottom
U$65  [#BYP#0]  15.75,98.04 0 bottom
U$66  [#MEAS#0]  19.18,84.07 0 bottom
U$67  [MICROMOD_LOGO_.5]  68.96,38.99 0 top
U$68  [MICROMOD_LOGO_.5]  38.61,22.1 0 bottom
U$69  [#VIN#0]  21.21,94.23 0 bottom
U$70  [#VE#0]  20.07,91.69 0 bottom
U$71  [RESET3]  102.23,83.69 0 top
U$72  [BOOT2]  111.51,83.69 0 top
U$73  [22229]  115.61,107.57 0 top
U$74  [3V31]  88.01,105.03 0 top
U$75  [SFE_LOGO_FLAME_.2]  104.14,106.3 0 top
U$76  [MICROMOD_LOGO_.5]  149.48,108.59 0 top
U$77  [MICROMOD_LOGO_.5]  119.13,91.69 0 bottom
U$78  [QWIIC_CARRIER_#_1X1_0]  142.37,106.17 0 top
U$79  [CHG0]  98.68,91.69 0 top
U$80  [#3#3V#0]  95.63,101.85 0 bottom
U$81  [#BYP#0]  96.27,98.04 0 bottom
U$82  [#MEAS#0]  99.7,84.07 0 bottom
U$83  [#VIN#0]  101.73,94.23 0 bottom
U$84  [#VE#0]  100.58,91.69 0 bottom

## Library data of the parts
BYP BYP1-BYP5 JP1-JP18 MEAS MEAS1-MEAS5 = SparkFun-Jumpers
C1 C6 C18 C26 C34 C42 = SparkFun-Capacitors; PROD_ID: CAP-00810
C2 C7 C19 C27 C35 C43 = SparkFun-Capacitors; PROD_ID: CAP-00811
C3 C4 C15 C16 C23 C24 C31 C32 C39 C40 C47 C48 = SparkFun-Capacitors; PROD_ID: CAP-14106
C5 C11 C13 C14 C17 C22 C25 C30 C33 C38 C41 C46 = SparkFun-Capacitors; PROD_ID: CAP-07822
C8 C9 C20 C28 C36 C44 = SparkFun-Capacitors; PROD_ID: CAP-11015
C10 C12 C21 C29 C37 C45 = SparkFun-Capacitors; PROD_ID: CAP-00868
D1 D6 D10 D14 D18 D22 = SparkFun-DiscreteSemi; PROD_ID: DIO-11284
D2 D5 D9 D13 D17 D21 = SparkFun-LED; PROD_ID: DIO-00819
D3 D7 D11 D15 D19 D23 = SparkFun-DiscreteSemi; PROD_ID: DIO-14072
D4 D8 D12 D16 D20 D24 = SparkFun-LED; PROD_ID: DIO-09003
E$1-E$4 FD1-FD24 LOGO1-LOGO18 U$14 U$29 U$43 U$44 U$59 U$75 = SparkFun-Aesthetics
E$5 E$6 = SparkFun-Retired
F1-F6 = SparkFun-Fuses; PROD_ID: RES-14313
H1-H4 H10-H13 H19-H22 H28-H31 H37-H40 H46-H49 = SparkFun-Hardware
H5-H9 H14-H18 H23-H27 H32-H36 H41-H45 H50-H54 = SparkFun-Hardware; PROD_ID: HW-14899
J1 J4 J8 J12 J17 J21 = SparkFun-Connectors; PROD_ID: CONN-14122
J2 J6 J10 J14 J19 J23 = SparkFun-Connectors; PROD_ID: CONN-13694
J3 J7 J11 J16 J20 J24 = SparkFun-Connectors; PROD_ID: CONN-11443; SF_ID: PRT-08612
J5 J9 J13 J15 J18 J22 = SparkFun-MicroMod; PROD_ID: CONN-14877
R1 R10 R17 R23 R29 R35 = SparkFun-Resistors; PROD_ID: RES-08272
R2 R3 R6 R7 R13 R14 R19 R20 R25 R26 R31 R32 = SparkFun-Resistors; PROD_ID: RES-12083
R4 R8 R11 R12 R15 R18 R21 R24 R27 R30 R33 R36 = SparkFun-Resistors; PROD_ID: RES-07856
R5 R9 R16 R22 R28 R34 = SparkFun-Resistors; PROD_ID: RES-07828
S1-S12 = SparkFun-Switches; PROD_ID: SWCH-14139
U1 U3 U6 U8 U10 U12 = SparkFun-IC-Power; PROD_ID: IC-09995
U2 U4 U5 U7 U9 U11 = SparkFun-IC-Power; PROD_ID: VREG-14094
U$1 U$13 U$28 U$42 U$58 U$74 = buzzard_labels (5)
U$2 U$10 U$12 U$25 U$27 U$39 U$41 U$54 U$55 U$57 U$71 U$73 = buzzard_labels (9)
U$3-U$9 U$17 U$18 U$20-U$24 U$32-U$38 U$47-U$53 U$62-U$66 U$69 U$70 U$78-U$84 = output
U$11 U$19 U$26 U$40 U$56 U$72 = buzzard_labels (10)
U$15 U$16 U$30 U$31 U$45 U$46 U$60 U$61 U$67 U$68 U$76 U$77 = SparkFun-MicroMod

## Nets
3.3V: J2.2 J15.2 J15.74 JP4.2 MEAS.2 MEAS.4
3.3V1: J5.2 J5.74 J6.2 JP2.2 MEAS1.2 MEAS1.4
3.3V2: J9.2 J9.74 J10.2 JP7.2 MEAS2.2 MEAS2.4
3.3V3: J13.2 J13.74 J14.2 JP10.2 MEAS3.2 MEAS3.4
3.3V4: J18.2 J18.74 J19.2 JP13.2 MEAS4.2 MEAS4.4
3.3V5: J22.2 J22.74 J23.2 JP16.2 MEAS5.2 MEAS5.4
3.3V_EN: J15.4 JP6.1
3.3V_EN1: J5.4 JP3.1
3.3V_EN2: J9.4 JP8.1
3.3V_EN3: J13.4 JP11.1
3.3V_EN4: J18.4 JP14.1
3.3V_EN5: J22.4 JP17.1
5V: C4.1 D3.C D4.A JP1.2 U1.4
5V1: C16.1 D7.C D8.A JP5.2 U3.4
5V2: C24.1 D11.C D12.A JP9.2 U6.4
5V3: C32.1 D15.C D16.A JP12.2 U8.4
5V4: C40.1 D19.C D20.A JP15.2 U10.4
5V5: C48.1 D23.C D24.A JP18.2 U12.4
!BOOT!: J15.11 S2.3 S2.4
!BOOT!1: J5.11 S4.3 S4.4
!BOOT!2: J9.11 S6.3 S6.4
!BOOT!3: J13.11 S8.3 S8.4
!BOOT!4: J18.11 S10.3 S10.4
!BOOT!5: J22.11 S12.3 S12.4
!RESET!: J15.6 S1.3 S1.4
!RESET!1: J5.6 S3.3 S3.4
!RESET!2: J9.6 S5.3 S5.4
!RESET!3: J13.6 S7.3 S7.4
!RESET!4: J18.6 S9.3 S9.4
!RESET!5: J22.6 S11.3 S11.4
GND: C1.2 C2.- C3.2 C4.2 C9.2 C10.2 C11.2 C13.2 D1.A D2.C H5.1 H6.1 H7.1 H8.1 H9.1 J1.GND J1.GND2 J2.1 J3.1 J15.1 J15.7 J15.33 J15.36 J15.39 J15.45 J15.75 R1.1 R2.1 R3.1 S1.1 S1.2 S2.1 S2.2 U1.2 U5.4 U5.EP
GND1: C5.2 C6.2 C7.- C8.2 C12.2 C14.2 C15.2 C16.2 D5.C D6.A H14.1 H15.1 H16.1 H17.1 H18.1 J4.GND J4.GND2 J5.1 J5.7 J5.33 J5.36 J5.39 J5.45 J5.75 J6.1 J7.1 R6.1 R7.1 R10.1 S3.1 S3.2 S4.1 S4.2 U2.4 U2.EP U3.2
GND2: C17.2 C18.2 C19.- C20.2 C21.2 C22.2 C23.2 C24.2 D9.C D10.A H23.1 H24.1 H25.1 H26.1 H27.1 J8.GND J8.GND2 J9.1 J9.7 J9.33 J9.36 J9.39 J9.45 J9.75 J10.1 J11.1 R13.1 R14.1 R17.1 S5.1 S5.2 S6.1 S6.2 U4.4 U4.EP U6.2
GND3: C25.2 C26.2 C27.- C28.2 C29.2 C30.2 C31.2 C32.2 D13.C D14.A H32.1 H33.1 H34.1 H35.1 H36.1 J12.GND J12.GND2 J13.1 J13.7 J13.33 J13.36 J13.39 J13.45 J13.75 J14.1 J16.1 R19.1 R20.1 R23.1 S7.1 S7.2 S8.1 S8.2 U7.4 U7.EP U8.2
GND4: C33.2 C34.2 C35.- C36.2 C37.2 C38.2 C39.2 C40.2 D17.C D18.A H41.1 H42.1 H43.1 H44.1 H45.1 J17.GND J17.GND2 J18.1 J18.7 J18.33 J18.36 J18.39 J18.45 J18.75 J19.1 J20.1 R25.1 R26.1 R29.1 S9.1 S9.2 S10.1 S10.2 U9.4 U9.EP U10.2
GND5: C41.2 C42.2 C43.- C44.2 C45.2 C46.2 C47.2 C48.2 D21.C D22.A H50.1 H51.1 H52.1 H53.1 H54.1 J21.GND J21.GND2 J22.1 J22.7 J22.33 J22.36 J22.39 J22.45 J22.75 J23.1 J24.1 R31.1 R32.1 R35.1 S11.1 S11.2 S12.1 S12.2 U11.4 U11.EP U12.2
I2C_SCL: J2.4 J15.14
I2C_SCL1: J5.14 J6.4
I2C_SCL2: J9.14 J10.4
I2C_SCL3: J13.14 J14.4
I2C_SCL4: J18.14 J19.4
I2C_SCL5: J22.14 J23.4
I2C_SDA: J2.3 J15.12
I2C_SDA1: J5.12 J6.3
I2C_SDA2: J9.12 J10.3
I2C_SDA3: J13.12 J14.3
I2C_SDA4: J18.12 J19.3
I2C_SDA5: J22.12 J23.3
N$1: C9.1 C10.1 C11.1 MEAS.1 MEAS.3 U5.1
N$2: R1.2 U1.5
N$3: R4.1 U1.1
N$4: JP4.1 R11.2
N$5: C3.1 D3.A J3.2 U1.3
N$6: D2.A R11.1
N$7: J4.A5 R6.2
N$8: D4.C R4.2
N$9: J4.B5 R7.2
N$10: J1.A5 R2.2
N$11: J1.B5 R3.2
N$12: JP2.1 R8.2
N$13: D5.A R8.1
N$14: C8.1 C12.1 C14.1 MEAS1.1 MEAS1.3 U2.1
N$15: R10.2 U3.5
N$16: C15.1 D7.A J7.2 U3.3
N$17: R12.1 U3.1
N$18: D8.C R12.2
N$19: J8.A5 R13.2
N$20: J8.B5 R14.2
N$21: JP7.1 R15.2
N$22: D9.A R15.1
N$23: C20.1 C21.1 C22.1 MEAS2.1 MEAS2.3 U4.1
N$24: R17.2 U6.5
N$25: C23.1 D11.A J11.2 U6.3
N$26: R18.1 U6.1
N$27: D12.C R18.2
N$28: J12.A5 R19.2
N$29: J12.B5 R20.2
N$30: JP10.1 R21.2
N$31: D13.A R21.1
N$32: C28.1 C29.1 C30.1 MEAS3.1 MEAS3.3 U7.1
N$33: R23.2 U8.5
N$34: C31.1 D15.A J16.2 U8.3
N$35: R24.1 U8.1
N$36: D16.C R24.2
N$37: J17.A5 R25.2
N$38: J17.B5 R26.2
N$39: JP13.1 R27.2
N$40: D17.A R27.1
N$41: C36.1 C37.1 C38.1 MEAS4.1 MEAS4.3 U9.1
N$42: R29.2 U10.5
N$43: C39.1 D19.A J20.2 U10.3
N$44: R30.1 U10.1
N$45: D20.C R30.2
N$46: J21.A5 R31.2
N$47: J21.B5 R32.2
N$48: JP16.1 R33.2
N$49: D21.A R33.1
N$50: C44.1 C45.1 C46.1 MEAS5.1 MEAS5.3 U11.1
N$51: R35.2 U12.5
N$52: C47.1 D23.A J24.2 U12.3
N$53: R36.1 U12.1
N$54: D24.C R36.2
USB_D+: J1.A6 J1.B6 J15.3
USB_D+1: J4.A6 J4.B6 J5.3
USB_D+2: J8.A6 J8.B6 J9.3
USB_D+3: J12.A6 J12.B6 J13.3
USB_D+4: J17.A6 J17.B6 J18.3
USB_D+5: J21.A6 J21.B6 J22.3
USB_D-: J1.A7 J1.B7 J15.5
USB_D-1: J4.A7 J4.B7 J5.5
USB_D-2: J8.A7 J8.B7 J9.5
USB_D-3: J12.A7 J12.B7 J13.5
USB_D-4: J17.A7 J17.B7 J18.5
USB_D-5: J21.A7 J21.B7 J22.5
V_USB: BYP.1 F2.1 J1.VBUS1 J1.VBUS2
V_USB1: BYP1.1 F1.1 J4.VBUS1 J4.VBUS2
V_USB2: BYP2.1 F3.1 J8.VBUS1 J8.VBUS2
V_USB3: BYP3.1 F4.1 J12.VBUS1 J12.VBUS2
V_USB4: BYP4.1 F5.1 J17.VBUS1 J17.VBUS2
V_USB5: BYP5.1 F6.1 J21.VBUS1 J21.VBUS2
VIN: BYP.2 C1.1 C2.+ C13.1 F2.2 J15.9 JP1.1 R5.2 U5.8
VIN1: BYP1.2 C5.1 C6.1 C7.+ F1.2 J5.9 JP5.1 R9.2 U2.8
VIN2: BYP2.2 C17.1 C18.1 C19.+ F3.2 J9.9 JP9.1 R16.2 U4.8
VIN3: BYP3.2 C25.1 C26.1 C27.+ F4.2 J13.9 JP12.1 R22.2 U7.8
VIN4: BYP4.2 C33.1 C34.1 C35.+ F5.2 J18.9 JP15.1 R28.2 U9.8
VIN5: BYP5.2 C41.1 C42.1 C43.+ F6.2 J22.9 JP18.1 R34.2 U11.8
VREG_EN: D1.C JP6.2 R5.1 U5.5
VREG_EN1: D6.C JP3.2 R9.1 U2.5
VREG_EN2: D10.C JP8.2 R16.1 U4.5
VREG_EN3: D14.C JP11.2 R22.1 U7.5
VREG_EN4: D18.C JP14.2 R28.1 U9.5
VREG_EN5: D22.C JP17.2 R34.1 U11.5